# EAGLE board Serial_CAN_Bus (EAGLE 6.4)
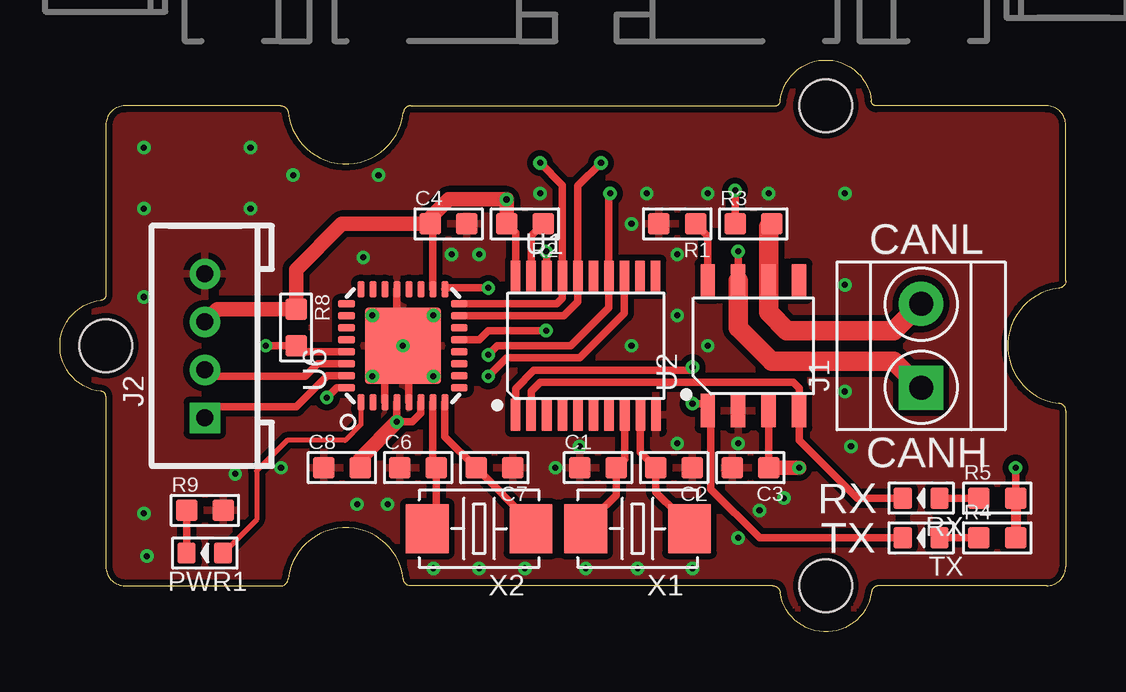
[diagram p0: board, top side]
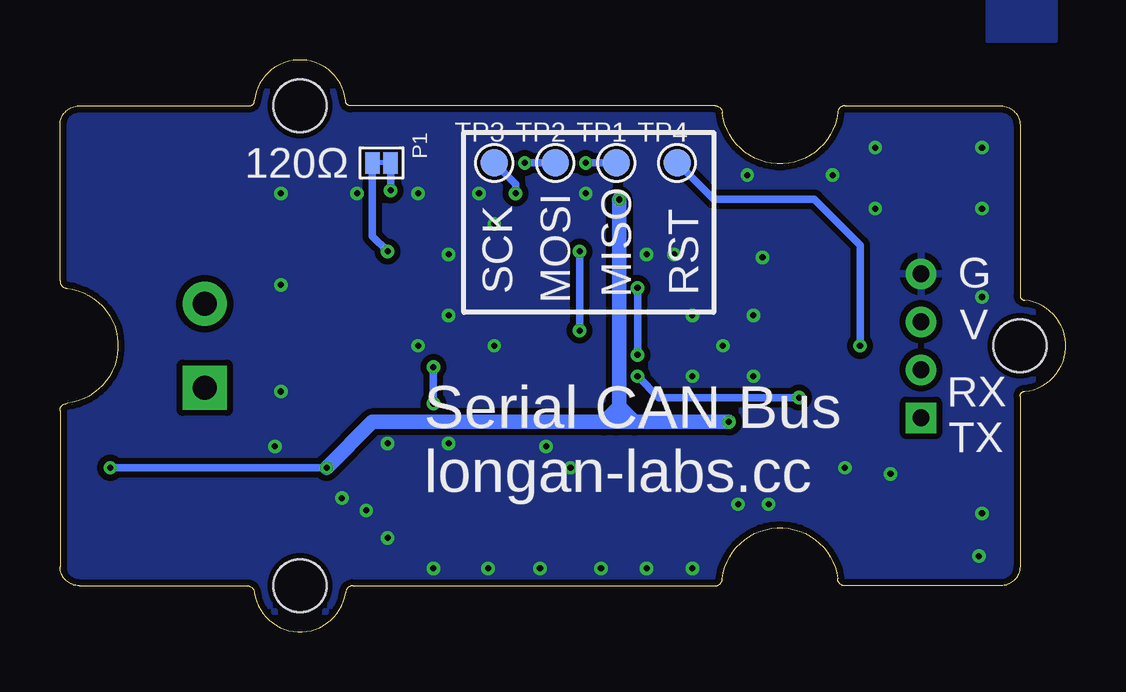
[diagram p1: board, bottom side, seen from below]

Size 41.91 x 23.83 mm. Coordinates in mm from the lower left corner, seen from the top.
Copper layers (1*16): Top 0.035mm / dielectric 1.5mm / Bottom 0.035mm
Design rules "SeeedStudio_2layer_DRU_no_angle_20140221 *": minimum track width 6mil, minimum drill 10mil, track to track 6mil, track to pad 6mil, pad to pad 6mil, via to via 6mil, smd to smd 0mil, copper to edge 10mil, drill to drill 10mil, minimum pad ring 10mil, minimum via ring 6mil, stop-mask expansion 2mil, vias tented up to drill 25mil, thermal gap 10mil
Net classes: 0 default: width 0.152 mm, clearance 0.152 mm; 3 usbvcc: width 0.152 mm, drill 0.152 mm, clearance 0.152 mm

## Footprints (pad centres in the part's own frame; a part is rotated, then mirrored left to right if it is on the bottom)
0603 = smd 0.889 x 0.889: 1 -0.762,0; 2 0.762,0
2P-3.5 = drill 1 pad 1.85 square: 1 -1.75,0 | drill 1 pad 1.85: 2 1.75,0
HW4-2.0 = drill 0.7 pad 1.27 square: 1 -3,0 | drill 0.7 pad 1.27: 2 -1,0; 3 1,0; 4 3,0
2P-SMD-1.78X1.27 = smd 0.889 x 0.61: 1 0,0.381; 2 0,-0.381
LED-0603 = smd 0.762 x 0.889: + -0.762,0; - 0.762,0
TP_4545 = smd 1.143 x 1.143: T 0,0
TSSOP20-0.65-6.5X4.4MM = smd 0.4 x 1.35: 1 -2.925,-2.875; 2 -2.275,-2.875; 3 -1.625,-2.875; 4 -0.975,-2.875; 5 -0.325,-2.875; 6 0.325,-2.875; 7 0.975,-2.875; 8 1.625,-2.875; 9 2.275,-2.875; 10 2.925,-2.875; 11 2.91,2.875; 12 2.26,2.875; 13 1.61,2.875; 14 0.96,2.875; 15 0.325,2.875; 16 -0.325,2.875; 17 -0.975,2.875; 18 -1.625,2.875; 19 -2.275,2.875; 20 -2.925,2.875
SOIC8-6.0 = smd 0.6 x 1.4: 1 -1.905,-2.7; 2 -0.635,-2.7; 3 0.635,-2.7; 4 1.905,-2.7; 5 1.905,2.7; 6 0.635,2.7; 7 -0.635,2.7; 8 -1.905,2.7
GROVE-TEST-PLATFORM = hole 2.2: -10,-10; -10,10; 20,0
MLF32X = smd 0.7 x 0.3: 1 -2.35,1.75; 2 -2.35,1.25; 3 -2.35,0.75; 4 -2.35,0.25; 5 -2.35,-0.25; 6 -2.35,-0.75; 7 -2.35,-1.25; 8 -2.35,-1.75; 17 2.35,-1.75; 18 2.35,-1.25; 19 2.35,-0.75; 20 2.35,-0.25; 21 2.35,0.25; 22 2.35,0.75; 23 2.35,1.25; 24 2.35,1.75 | smd 0.3 x 0.7: 9 -1.75,-2.35; 10 -1.25,-2.35; 11 -0.75,-2.35; 12 -0.25,-2.35; 13 0.25,-2.35; 14 0.75,-2.35; 15 1.25,-2.35; 16 1.75,-2.35; 25 1.75,2.35; 26 1.25,2.35; 27 0.75,2.35; 28 0.25,2.35; 29 -0.25,2.35; 30 -0.75,2.35; 31 -1.25,2.35; 32 -1.75,2.35 | smd 3.175 x 3.175: HEAT 0,0
X2-SMD-5.0X3.2X1.3MM = smd 1.778 x 2.032: 1 -2.159,0; 2 2.159,0

## Placement (x,y rotation side)
C1  22pF  [0603]  22.42,6.84 0 top
C2  22pF  [0603]  25.59,6.84 180 top
C3  100nF  [0603]  28.77,6.84 180 top
C4  100nF  [0603]  16.19,17 0 top
C6  22pF  [0603]  14.92,6.84 0 top
C7  22pF  [0603]  18.1,6.84 180 top
C8  100nF  [0603]  11.75,6.84 0 top
J1  Screw Terminal  [2P-3.5]  35.88,11.92 90 top
J2  320110033  [HW4-2.0]  6.03,11.92 90 top
P1  [2P-SMD-1.78X1.27]  28.51,19.54 270 bottom
PWR1  GREEN  [LED-0603]  6.03,3.29 180 top
R1  47k  [0603]  25.72,17 180 top
R2  10k  [0603]  19.37,17 180 top
R3  120R  [0603]  28.89,17 0 top
R4  1k  [0603]  39.05,3.92 0 top
R5  1k  [0603]  39.05,5.57 0 top
R8  10k  [0603]  9.84,12.68 270 top
R9  1k  [0603]  6.03,5.06 0 top
RX  RED  [LED-0603]  35.88,5.57 180 top
TP1  [TP_4545]  18.73,19.54 0 bottom
TP2  [TP_4545]  21.27,19.54 0 bottom
TP3  [TP_4545]  23.81,19.54 0 bottom
TP4  [TP_4545]  16.19,19.54 0 bottom
TX  RED  [LED-0603]  35.88,3.92 180 top
U1  MCP2515  [TSSOP20-0.65-6.5X4.4MM]  21.91,11.92 0 top
U2  MCP2551  [SOIC8-6.0]  28.89,11.92 0 top
U3  [GROVE-TEST-PLATFORM]  21.91,11.92 180 top
U6  ATMEGA328P  [MLF32X]  14.29,11.92 90 top
X1  16MHz  [X2-SMD-5.0X3.2X1.3MM]  24.07,4.3 180 top
X2  16MHz  [X2-SMD-5.0X3.2X1.3MM]  17.46,4.3 180 top

## Library data of the parts
C1-C4 C6-C8 P1 PWR1 R1-R5 R8 R9 RX TX = Discrete
J1 J2 = Connector-new
TP1-TP4 = Discrete; PARTNO: DNP
U1 = Heilight
U2 = IC
U3 = template
U6 = ICs_v54
X1 X2 = Discrete-new

## Nets
CANH: J1.1 P1.2 U2.7
CANL: J1.2 R3.2 U2.6
GND: C1.1 C2.1 C3.2 C4.2 C6.1 C7.1 C8.1 J2.4 R1.2 R9.2 U1.10 U2.2 U6.3 U6.5 U6.21 U6.HEAT
INT: U1.13 U6.32
MISO: TP1.T U1.17 U6.16
MOSI: TP2.T U1.16 U6.15
N$1: P1.1 R3.1
N$2: R4.1 TX.+
N$3: C6.2 U6.7 X2.2
N$4: C7.2 U6.8 X2.1
N$5: R8.2 TP4.T U6.29
N$6: PWR1.+ U6.1
N$7: PWR1.- R9.1
N$15: R5.1 RX.+
N$16: C1.2 U1.8 X1.2
N$17: C2.2 U1.9 X1.1
N$20: R1.1 U2.8
RST_N: R2.1 U1.19
RX: J2.2 U6.30
RX_CAN: RX.- U1.2 U2.4
SCK: TP3.T U1.14 U6.17
SPI_CS: U1.18 U6.13
TX: J2.1 U6.31
TX_CAN: TX.- U1.1 U2.1
VCC: C3.1 C4.1 C8.2 J2.3 R2.2 R4.2 R5.2 R8.1 U1.20 U2.3 U6.4 U6.6 U6.18

## Tracks (layer width: path | path; a pad name or v marks a point on that pad's centre or on a via)
CANH  (via drill 0.25 pad 0.51)
  Top 0.305: U2.7 v28.26,15.86
  Top 0.813: J1.1 35.85,10.17 34.74,11.29 29.66,11.29 28.26,12.68 U2.7
  Bottom 0.203: 28.26,19.54 P1.2
  Bottom 0.305: v28.26,15.86 28.89,16.49 P1.2
CANL
  Top 0.813: J1.2 35.85,13.67 34.74,12.56 30.29,12.56 29.53,13.32 U2.6 29.53,16.87 R3.2
GND  (via drill 0.25 pad 0.51)
  Top 0.305: U6.21 14.04,12.69 14.03,12.68 14.03,12.18 U6.HEAT | U6.5 14.54,11.67 U6.HEAT | U6.3 13.54,11.55 13.65,11.67 14.03,11.67 U6.HEAT
  other vias: 16.32,15.73 17.46,15.73 13.02,13.19 15.56,13.19 15.56,10.65 13.02,10.65 14.29,11.92 9.21,6.84 12.38,5.32 13.65,5.32 20.64,6.84 21.65,7.73 25.72,7.86 28.26,7.86 28.26,3.92 29.15,5.06 30.16,5.57 23.81,17 25.72,15.73 25.72,13.19 23.81,11.92 26.99,11.92 24.45,18.27 26.99,18.27 29.53,18.27 7.94,17.64 9.72,19.03 13.27,19.03 12.64,15.6 20,18.27 3.49,4.94 7.94,20.18 3.49,13.95 3.62,3.16 3.49,20.18 7.3,6.59 32.7,14.46 32.7,10.02 32.96,7.73 32.7,18.27 15.56,2.65 17.46,2.65 19.37,2.65 21.91,2.65 24.07,2.65 26.35,2.65 3.49,17.64
  pour Bottom: 0.45,24.62 3.24,24.62 3.24,27.54 0.45,27.54
  pour Bottom (isolate 0.254): -0.32,-0.14 42.23,-0.14 42.23,23.99 -0.32,23.99
  pour Top (isolate 0.254): -0.32,-0.14 42.23,-0.14 42.23,23.99 -0.32,23.99
INT  (via drill 0.25 pad 0.51)
  Top 0.305: U6.32 11.52,10.17 v11.11,9.76 | U1.13 23.52,13.28 21.65,11.41 18.61,11.41 v17.84,10.65
  Bottom 0.305: v17.84,10.65 16.96,9.76 v11.11,9.76
MISO  (via drill 0.25 pad 0.51)
  Top 0.305: U6.16 20.7,13.67 20.93,13.9 U1.17 20.93,18.61 v20,19.54
  Bottom 0.305: v20,19.54 TP1.T
MOSI  (via drill 0.25 pad 0.51)
  Top 0.305: U6.15 20.99,13.17 21.58,13.76 U1.16 21.58,18.58 v22.54,19.54
  Bottom 0.305: v22.54,19.54 TP2.T
N$1  (via drill 0.25 pad 0.51)
  Top 0.305: v28.13,18.4 R3.1
  Bottom 0.305: P1.1 v28.13,18.4
N$2
  Top 0.305: R4.1 TX.+
N$3
  Top 0.305: U6.7 15.54,6.99 C6.2 15.69,3.92 | 15.69,3.92 15.81,3.79 | 15.69,3.92 X2.2
N$4
  Top 0.305: U6.8 16.04,8.14 C7.2 19.62,4.56 X2.1
N$5  (via drill 0.25 pad 0.51)
  Top 0.305: U6.29 9.85,11.67 R8.2 v8.57,11.92
  Bottom 0.305: v8.57,11.92 8.57,16.11 10.48,18.02 14.67,18.02 TP4.T
N$6
  Top 0.203: U6.1 12.54,8.65 11.88,7.98 9.46,7.98 8.19,6.71 8.19,4.68 PWR1.+
N$7
  Top 0.305: PWR1.- R9.1
N$15
  Top 0.305: RX.+ R5.1
N$16
  Top 0.305: U1.8 23.53,7.2 C1.2 23.18,5.7 22.29,4.81 22.29,4.68 X1.2
N$17
  Top 0.305: U1.9 24.18,7.49 C2.2 24.83,5.83 25.72,4.94 25.72,4.81 X1.1
N$20
  Top 0.305: U2.8 26.99,16.49 R1.1
RST_N
  Top 0.305: U1.19 19.63,16.5 R2.1
RX
  Top 0.305: U6.30 10.74,11.17 10.22,10.65 6.3,10.65 J2.2
RX_CAN
  Top 0.305: U1.2 19.63,10.03 20,10.4 30.54,10.4 30.8,10.14 U2.4 30.8,7.98 33.21,5.57 RX.-
SCK  (via drill 0.25 pad 0.51)
  Top 0.305: v17.84,14.33 16.1,14.33 U6.17 | v17.84,11.54 18.23,11.92 21.27,11.92 22.87,13.52 U1.14 22.87,18.22 v22.92,18.27
  Bottom 0.305: v17.84,11.54 v17.84,14.33 | v22.92,18.27 22.92,18.65 TP3.T
SPI_CS  (via drill 0.25 pad 0.51)
  Top 0.305: U1.18 20.28,15.83 v20.26,15.86 | v20.26,12.56 17.84,12.56 17.46,12.17 U6.13
  Bottom 0.305: v20.26,15.86 v20.26,12.56
TX
  Top 0.305: J2.1 6.49,9.38 9.84,9.38 11.13,10.67 U6.31
TX_CAN  (via drill 0.25 pad 0.51)
  Top 0.305: v26.35,9.51 27.12,9.51 26.99,9.38 U2.1 27.12,9.09 27.12,5.95 29.15,3.92 TX.- | U1.1 18.98,10.14 19.75,10.91 26.23,10.91 v26.35,11.03
  Bottom 0.305: v26.35,11.03 v26.35,9.51
VCC  (via drill 0.25 pad 0.51)
  Top 0.305: U6.4 v14.04,8.75 14.67,8.75 15.04,9.12 U6.6 | U6.18 15.54,16.89 C4.1 | U1.20 18.98,16.62 R2.2 | U2.3 C3.1 | R5.2 v39.82,6.84
  Top 0.406: R5.2 R4.2
  Top 0.61: J2.3 6.56,13.45 R8.1 9.84,15.1 11.75,17 C4.1 15.43,17.26 16.19,18.02 v18.61,18.02 R2.2 18.61,17.13 | v30.8,6.84 C3.1 | C8.2 12.51,7.22 v14.04,8.75
  Bottom 0.305: v39.82,6.84 v30.8,6.84
  Bottom 0.61: v14.04,8.75 17.98,8.75 | 17.98,8.75 18.73,8.75 | 19.24,8.75 28.89,8.75 v30.8,6.84 | v18.61,18.02 18.61,9.38 | 18.61,9.38 18.61,8.88 18.73,8.75 | 17.98,8.75 18.61,9.38 | 18.61,9.38 19.24,8.75 | 18.73,8.75 19.24,8.75 | 19.24,8.75

## Text on the board
tPlace: CANL | CANH | RX | TX
bPlace: MISO | 120Ω | RST | G | V | MOSI | SCK | RX | TX | Serial CAN Bus | longan-labs.cc